# EAGLE board HackMiamiBT (EAGLE 6.5.0)
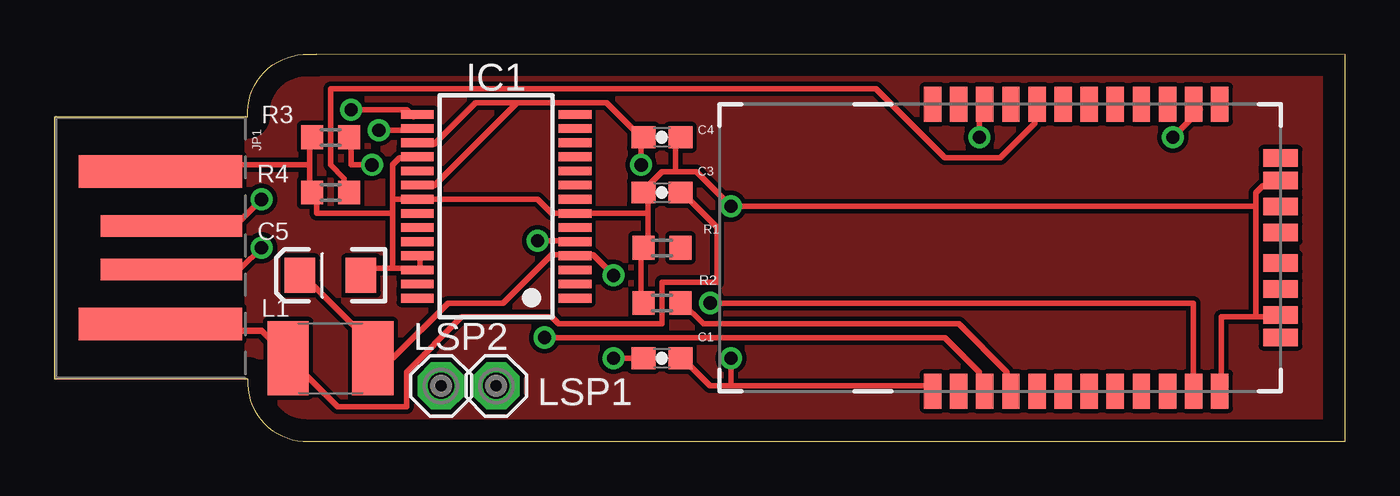
[diagram p0: board, top side]
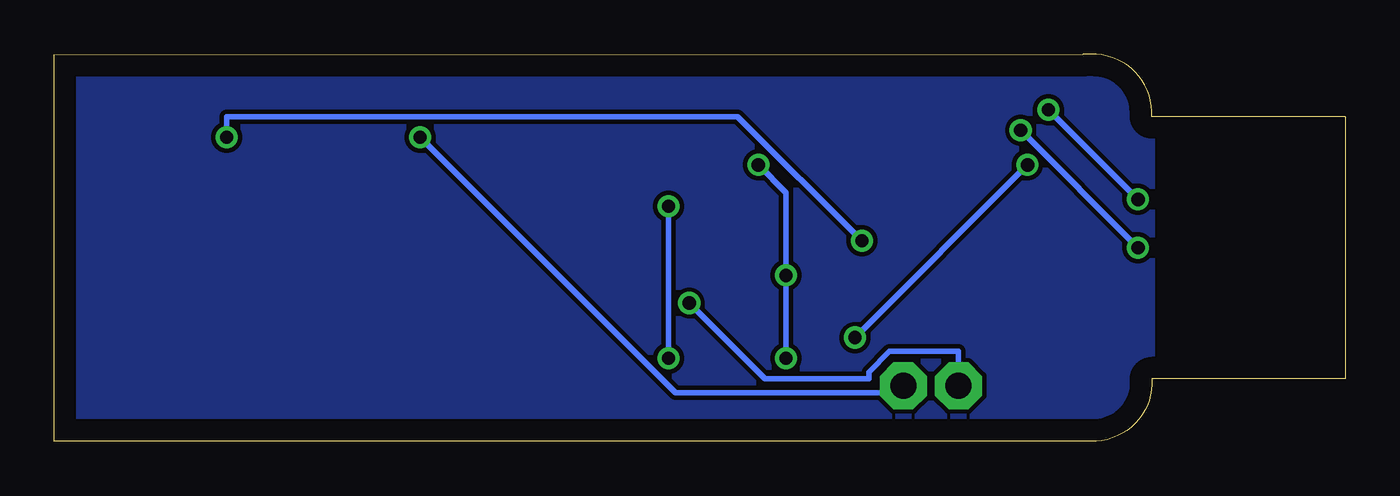
[diagram p1: board, bottom side, seen from below]

Size 59.36 x 17.78 mm. Coordinates in mm from the lower left corner, seen from the top.
Outline: 11.43,0 59.36,0 59.36,17.77 12.05,17.78 11.43,17.78 arc90 8.89,14.92 0,14.92 0,2.86 8.89,2.86 arc90 11.43,0
Copper layers (1*16): Top 0.035mm / dielectric 1.5mm / Bottom 0.035mm
Design rules "default": minimum track width 10mil, minimum drill 24mil, track to track 8mil, track to pad 8mil, pad to pad 8mil, via to via 8mil, smd to smd 8mil, copper to edge 40mil, drill to drill 8mil, minimum pad ring 10mil, minimum via ring 8mil, stop-mask expansion 4mil, vias tented up to drill 0mil, thermal gap 10mil
Net classes: 0 default: width 0.254 mm, drill 0.203 mm, clearance 0.203 mm

## Footprints (pad centres in the part's own frame; a part is rotated, then mirrored left to right if it is on the bottom)
0603-CAP = smd 1.1 x 1: 1 -0.85,0; 2 0.85,0
EIA3216 = smd 1.4 x 1.6: A 1.4,0; C -1.4,0
SSOP28 = smd 0.4 x 1.5: 1 -4.225,-3.625; 2 -3.575,-3.625; 3 -2.925,-3.625; 4 -2.275,-3.625; 5 -1.625,-3.625; 6 -0.975,-3.625; 7 -0.325,-3.625; 8 0.325,-3.625; 9 0.975,-3.625; 10 1.625,-3.625; 11 2.275,-3.625; 12 2.925,-3.625; 13 3.575,-3.625; 14 4.225,-3.625; 15 4.225,3.625; 16 3.575,3.625; 17 2.925,3.625; 18 2.275,3.625; 19 1.625,3.625; 20 0.975,3.625; 21 0.325,3.625; 22 -0.325,3.625; 23 -0.975,3.625; 24 -1.625,3.625; 25 -2.275,3.625; 26 -2.925,3.625; 27 -3.575,3.625; 28 -4.225,3.625
USB-A-PCB = smd 7.5 x 1.5: 5V -0.2,-3.5; GND -0.2,3.5 | smd 6.5 x 1: USB_M 0.3,-1; USB_P 0.3,1
L1812 = smd 1.9 x 3.4: 1 -1.95,0; 2 1.95,0
MCS08 = drill 1.194 pad 2.159 octagon: MP 0,0
R0603 = smd 1 x 1.1: 1 -0.85,0; 2 0.85,0
RN41 = smd 0.8 x 1.6: 1 -6.6,-6.6; 2 -5.4,-6.6; 3 -4.2,-6.6; 4 -3,-6.6; 5 -1.8,-6.6; 6 -0.6,-6.6; 7 0.6,-6.6; 8 1.8,-6.6; 9 3,-6.6; 10 4.2,-6.6; 11 5.4,-6.6; 12 6.6,-6.6; 13 6.6,6.6; 14 5.4,6.6; 15 4.2,6.6; 16 3,6.6; 17 1.8,6.6; 18 0.6,6.6; 19 -0.6,6.6; 20 -1.8,6.6; 21 -3,6.6; 22 -4.2,6.6; 23 -5.4,6.6; 24 -6.6,6.6 | smd 1.6 x 0.8: 28 9.4,3.1; 29 9.4,-3.1; 30 9.4,4.122; 31 9.4,1.9; 32 9.4,0.7; 33 9.4,-0.7; 34 9.4,-1.9; 35 9.4,-4.122

## Placement (x,y rotation side)
C1  0.1uF  [0603-CAP]  27.94,3.81 0 top
C3  10nF  [0603-CAP]  27.94,11.43 0 top
C4  0.1uF  [0603-CAP]  27.94,13.97 0 top
C5  10uF  [EIA3216]  12.7,7.62 180 top
IC1  FT232RL  [SSOP28]  20.32,10.79 90 top
JP1  USBPCB  [USB-A-PCB]  5.08,8.89 0 top
L1  33nH  [L1812]  12.7,3.81 0 top
LSP1  MCS08  [MCS08]  20.32,2.54 0 top
LSP2  MCS08  [MCS08]  17.78,2.54 0 top
R1  10K  [R0603]  27.94,8.89 0 top
R2  10K  [R0603]  27.94,6.35 0 top
R3  10K  [R0603]  12.7,13.97 0 top
R4  10K  [R0603]  12.7,11.43 0 top
U$2  BLUETOOTH-RN41"  [RN41]  46.99,8.89 0 top

## Library data of the parts
C1 C3-C5 = SparkFun
IC1 = ftdichip; MPN: FT232RL; OC_FARNELL: 1146032; OC_NEWARK: 91K9918
JP1 = SparkFun-Connectors
L1 R1-R4 = resistor
LSP1 LSP2 = solpad
U$2 = SparkFun-RF

## Nets
GND: C1.2 C3.1 C4.2 C5.C IC1.7 IC1.18 IC1.21 IC1.25 IC1.26 JP1.GND R1.1 R2.1 R3.1 R4.1 U$2.1 U$2.12 U$2.28 U$2.29
N$1: R3.2 U$2.3
N$2: C3.2 JP1.5V L1.1
N$3: LSP2.MP U$2.11
N$4: U$2.5
N$5: IC1.1
N$6: IC1.16 JP1.USB_M
N$7: IC1.15 JP1.USB_P
N$8: IC1.5 U$2.14
N$9: IC1.3
N$10: U$2.16
N$11: R2.2 U$2.4
N$12: LSP1.MP U$2.22
N$14: R4.2 U$2.20
VCC: C1.1 C4.1 C5.A IC1.4 IC1.17 IC1.20 L1.2

## Tracks (layer width: path | path; a pad name or v marks a point on that pad's centre or on a via)
GND  (via drill 0.61)
  Top 0.254: 11.75,12.7 11.75,13.97 R3.1 | 11.75,12.7 11.75,11.43 R4.1 12.06,11.43 12.06,10.48 15.56,10.48 | 11.75,12.7 5.08,12.7 JP1.GND | 55.24,5.71 56.2,5.71 U$2.29 | 55.24,5.71 53.66,5.71 53.66,2.54 U$2.12 | 55.24,5.71 55.24,10.79 | 55.24,10.79 55.24,11.43 55.56,11.75 56.2,11.75 U$2.28 | 31.11,2.54 40.32,2.54 U$2.1 | 31.11,2.54 30.16,2.54 28.89,3.81 C1.2 | IC1.25 16.83,8.57 16.83,7.94 IC1.26 16.51,7.94 15.56,7.94 | 15.56,7.94 14.61,7.94 14.29,7.62 C5.C | R2.1 26.99,6.35 26.99,8.89 R1.1 27.3,8.89 27.3,10.48 | 27.3,10.48 27.3,11.43 C3.1 26.99,11.43 27.94,12.38 28.57,12.38 | 28.57,12.38 28.57,13.97 C4.2 | 27.3,10.48 24.13,10.48 IC1.7 23.81,10.48 22.86,10.48 22.23,11.11 16.83,11.11 IC1.21 16.51,11.11 15.56,11.11 | 15.56,11.11 15.56,12.7 15.88,13.02 16.51,13.02 IC1.18 | 15.56,11.11 15.56,10.48 | 15.56,10.48 15.56,7.94 | v31.11,3.81 31.11,2.54 | 28.57,12.38 29.53,12.38 v31.11,10.79 55.24,10.79
  Bottom 0.254: v31.11,10.79 v31.11,3.81
N$1  (via drill 0.61)
  Top 0.254: v14.61,12.7 13.65,12.7 13.65,13.97 R3.2 | v22.54,4.76 40.96,4.76 42.55,3.17 42.55,2.54 U$2.3
  Bottom 0.254: v22.54,4.76 v14.61,12.7
N$2
  Top 0.254: C3.2 28.89,11.43 30.48,9.84 30.48,7.3 27.94,7.3 27.94,5.4 23.18,5.4 22.86,5.71 18.73,5.71 16.19,3.17 16.19,1.59 13.02,1.59 10.79,3.81 L1.1
  Top 0.305: JP1.5V 5.19,5.08 9.53,5.08 10.75,3.85 L1.1
N$3  (via drill 0.61)
  Top 0.254: v30.16,6.35 52.39,6.35 52.39,2.54 U$2.11
  Bottom 0.254: v30.16,6.35 26.67,2.86 21.91,2.86 21.91,3.17 20.95,4.13 17.78,4.13 LSP2.MP
N$6  (via drill 0.61)
  Top 0.254: v14.92,14.29 16.51,14.29 IC1.16 | v9.53,8.89 8.57,7.94 5.4,7.94 JP1.USB_M
  Bottom 0.254: v9.53,8.89 v14.92,14.29
N$7  (via drill 0.61)
  Top 0.254: v13.65,15.24 16.19,15.24 16.51,14.92 IC1.15 | v9.53,11.11 8.57,10.16 5.4,10.16 JP1.USB_P
  Bottom 0.254: v9.53,11.11 v13.65,15.24
N$8  (via drill 0.61)
  Top 0.254: v22.23,9.21 23.81,9.21 IC1.5 | v51.44,13.97 52.7,15.24 U$2.14
  Bottom 0.254: v22.23,9.21 27.94,14.92 51.44,14.92 v51.44,13.97
N$11
  Top 0.254: R2.2 28.89,6.35 29.84,5.4 41.59,5.4 43.81,3.17 43.81,2.54 U$2.4
N$12  (via drill 0.61)
  Top 0.254: v42.55,13.97 42.55,15.24 U$2.22
  Bottom 0.254: v42.55,13.97 30.8,2.22 20.32,2.22 LSP1.MP
N$13
  pour Top: 8.89,15.24 8.89,3.17 arc90 12.06,0 59.69,0 59.69,17.78 11.43,17.78 arc90
  pour Bottom: 8.89,15.24 8.89,3.17 arc90 12.06,0 59.69,0 59.69,17.78 11.43,17.78 arc90
N$14
  Top 0.254: R4.2 13.34,11.43 13.34,12.06 12.7,12.7 12.7,16.19 37.78,16.19 40.96,13.02 43.5,13.02 45.09,14.61 45.09,15.24 U$2.20
VCC  (via drill 0.61)
  Top 0.254: 26.99,13.97 25.4,15.56 21.27,15.56 | 21.27,15.56 19.37,15.56 17.46,13.65 16.83,13.65 IC1.17 | 21.27,15.56 17.46,11.75 16.83,11.75 IC1.20 | v25.72,3.81 C1.1 | v25.72,7.62 24.77,8.57 24.13,8.57 IC1.4 23.81,8.57 22.86,8.57 20.64,6.35 18.1,6.35 15.56,3.81 L1.2 14.61,3.81 14.61,4.45 11.43,7.62 C5.A | v26.99,12.7 26.99,13.97 | 26.99,13.97 C4.1
  Bottom 0.254: v25.72,3.81 v25.72,7.62 25.72,11.43 v26.99,12.7